# Altium PCB JSTtoMOLEX(1).PcbDoc
Units mm, origin at the board's own origin, x right, y up, seen from the top; angles counter-clockwise.
Board outline 109 x 67 mm, 2 copper layers (Top Layer, Bottom Layer); 3 components, 11 nets, 41 pads, 0 vias.
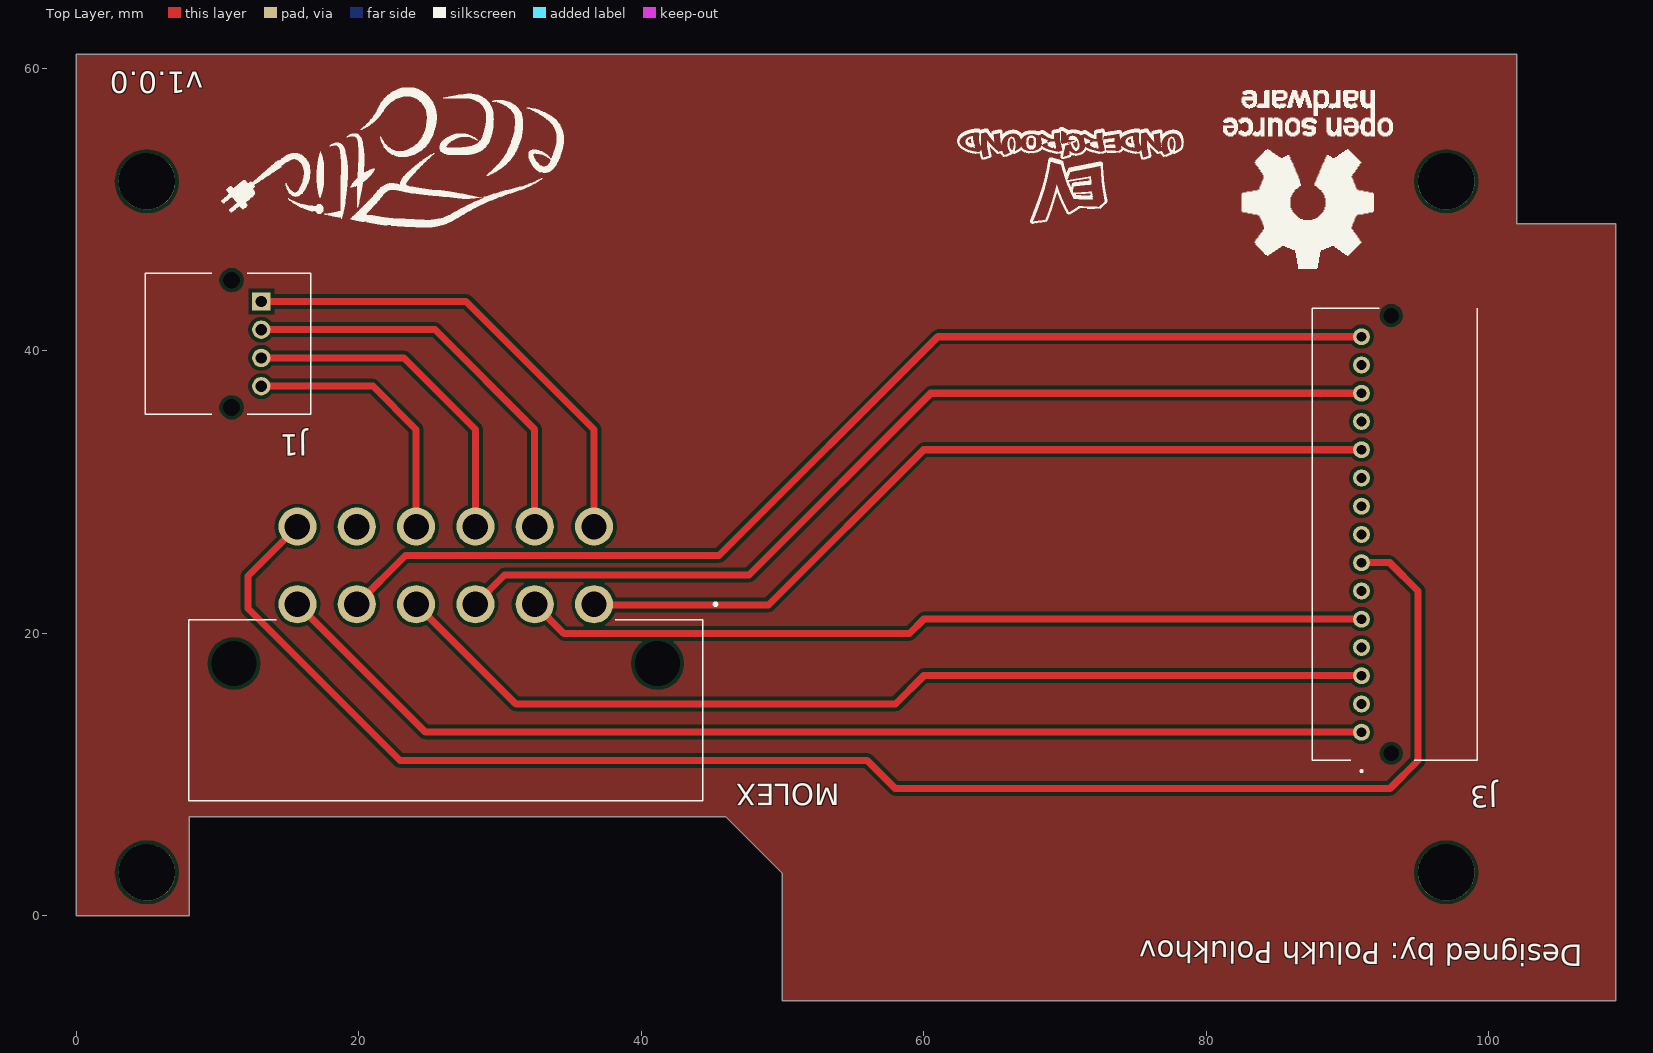
[diagram p0: Top Layer view]
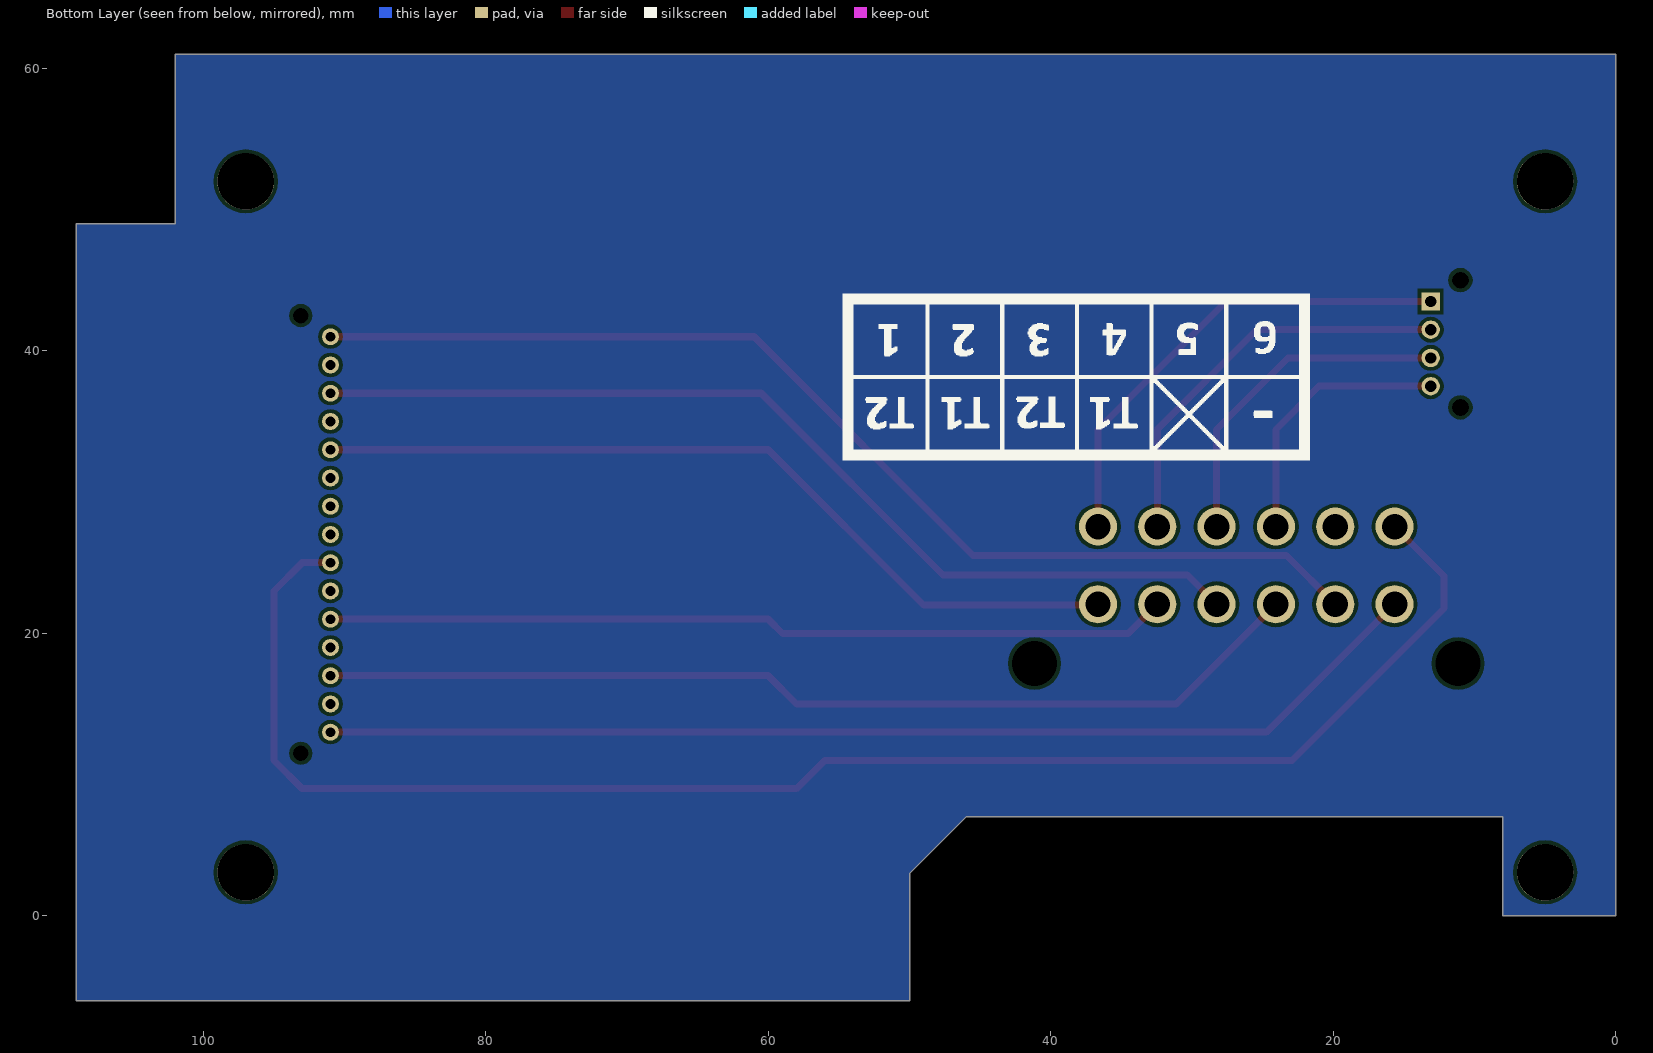
[diagram p1: Bottom Layer view, seen from below]
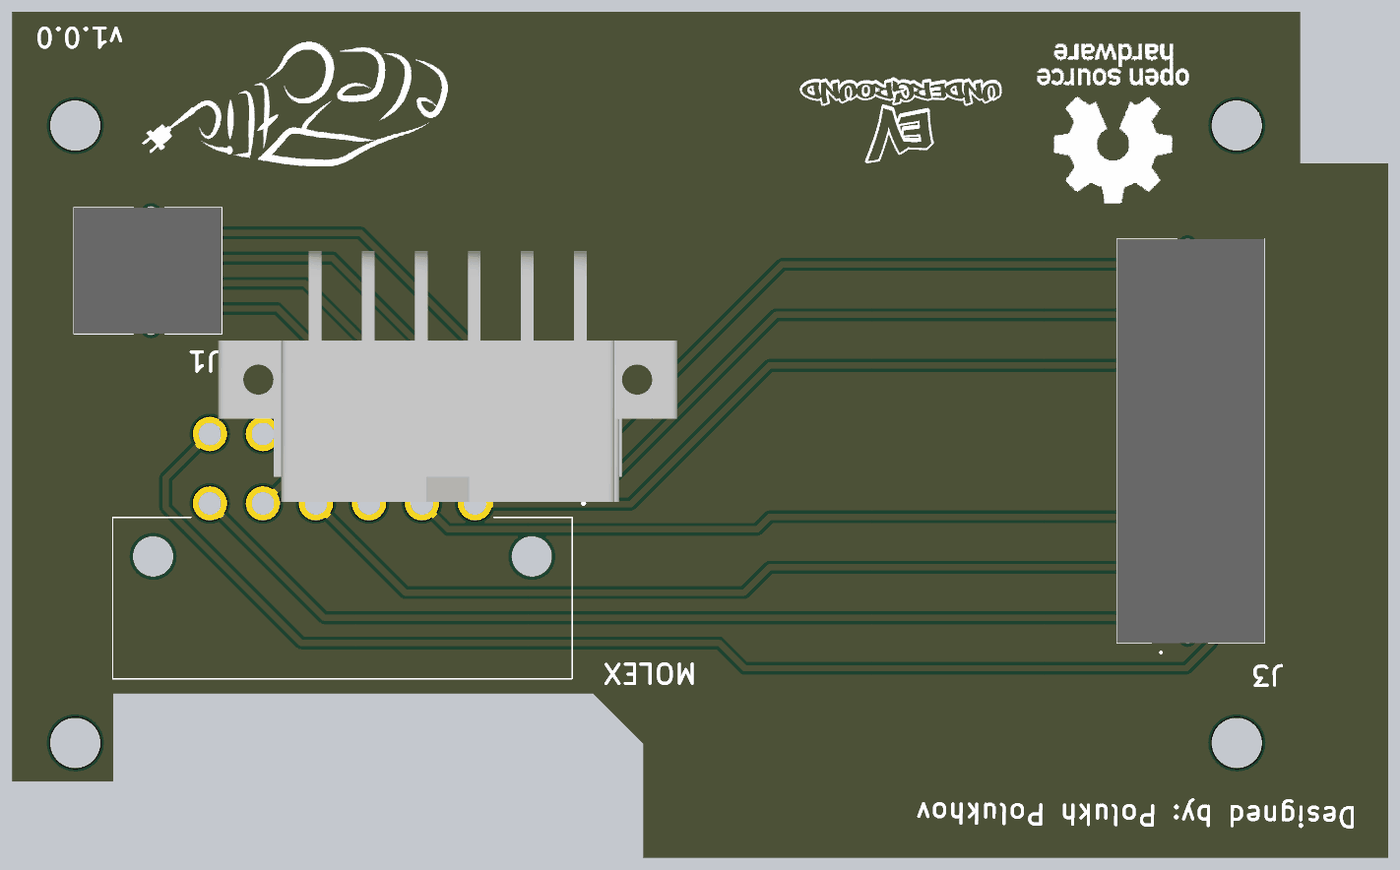
[diagram p2: 3D render of the assembled board from above, using the file's embedded part models]

## Layer stack, top to bottom
Top Solder: solder mask 0.0102, Solder Resist, Dk 3.5
Top Layer: signal copper 0.0356
Dielectric 1: dielectric 0.32, FR-4, Dk 4.8
Bottom Layer: signal copper 0.0356
Bottom Solder: solder mask 0.0102, Solder Resist, Dk 3.5

## Board outline
8,7 46,7 50,3 50,-6 109,-6 109,49 102,49 102,61 0,61 0,0 8,0

## Design rules (kind name [scope] priority, off if disabled: settings)
Clearance [All] p1: gap=0.254 ignorepadtopadclearanceinfootprint=FALSE except(0: Arc-Hole Track-Hole SMDPad-Hole THPad-Hole Via-Hole Fill-Hole Poly-Hole Region-Hole Text-Hole)
PolygonConnect [All] p1: connectstyle=Relief reliefconductorwidth=0.254 reliefentries=4 polygonreliefangle="90 Angle" airgapwidth=0.254
RoomDefinition JSTtoMOLEX [InComponentClass('JSTtoMOLEX')] p1: confinementstyle=ConfineIn formatcopy=TRUE lockcomponents=FALSE outline 0,-6 109.07,-6 109.07,61.03 0,61.03
RoutingVias [All] p1: holewidth=0.711 width=1.27 viastyle="Through Hole" minholewidth=0.711 minwidth=1.27 maxholewidth=0.711 maxwidth=1.27
SolderMaskExpansion [All] p1: expansion=0.102 istentingtop=FALSE
Width [All] p1: maxlimit=0.5 minlimit=0.254 preferedwidth=0.254
30 further rules are at their usual default settings.

## Components (designator, comment, footprint, x,y, rotation, side; value= is the part's Value field where it differs from the comment)
J1 "S04B-PASK-2" S04BPASK2 13.1,43.5 r90 top
J3 "S15B-PASK-2__LF__SN_" S15BPASK2LFSN 91,13 r270 top
MOLEX "39-29-1128" 39291128 36.66,22.06 r0 top (schematic designator J2)

## Footprints (in the part's own frame and the unit in brackets; to place one, negate y for a bottom-side part, rotate by r counter-clockwise, add the part's x,y. Pads: shape width x height; smd on the part's side, far side on the other; paste and mask are expansions set on the pad)
39291128 [mm]
  round 2.7 hole 1.8: 1(0,0) 2(-4.2,0) 3(-8.4,0) 4(-12.6,0) 5(-16.8,0) 6(-21,0) 7(0,5.5) 8(-4.2,5.5) 9(-8.4,5.5) 10(-12.6,5.5) 11(-16.8,5.5) 12(-21,5.5)
  round 1.6 hole 3.2 unplated: MH1(-25.5,-4.2) MH2(4.5,-4.2)
  silkscreen extent -28.7,-13.9 8.7,0.1, body extent -20.36,0.11 16.04,20.01, height 11.27
S04BPASK2 [mm]
  rect 1.3x1.3 hole 0.8: 1(0,0)
  round 1.3 hole 0.8: 2(-2,0) 3(-4,0) 4(-6,0)
  round 0.6 hole 1.2 unplated: MH1(1.5,2.1) MH2(-7.5,2.1)
  silkscreen extent -8,-3.5 2,8.2, body extent -8,-3.5 2,8.2, height 6.6
S15BPASK2LFSN [mm]
  round 1.2 hole 0.7: 1(0,0) 2(-2,0) 3(-4,0) 4(-6,0) 5(-8,0) 6(-10,0) 7(-12,0) 8(-14,0) 9(-16,0) 10(-18,0) 11(-20,0) 12(-22,0) 13(-24,0) 14(-26,0) 15(-28,0)
  round 0.55 hole 1.1 unplated: MH1(1.5,2.1) MH2(-29.5,2.1)
  silkscreen extent -30,-3.5 2.8,8.2, body extent -30,-3.5 2,8.2, height 7.8

## Part data
J1: "Connector", Manufacturer_Name="JST (JAPAN SOLDERLESS TERMINALS)", Datasheet Link=http://www.jst-mfg.com/product/pdf/eng/ePA-F.pdf?5d80b7662b42f, Height=6.5mm, Manufacturer_Part_Number=S04B-PASK-2
J3: "Connector", Manufacturer_Name="JST (JAPAN SOLDERLESS TERMINALS)", Manufacturer_Part_Number="S15B-PASK-2 (LF)(SN)", Datasheet Link=http://uk.rs-online.com/web/p/products/5469498, Height=7.7mm
MOLEX: "Connector", Manufacturer_Name=Molex, Mouser Part Number=538-39-29-1128, Datasheet Link=https://www.molex.com/pdm_docs/sd/039291128_sd.pdf, Height=11.7mm, Manufacturer_Part_Number=39-29-1128, Mouser Price/Stock=https://www.mouser.co.uk/ProductDetail/Molex/39-29-1128?qs=53in8j6h7oTziUEN8ceqiA%3D%3D

## Free pads (board coordinates)
  round 4 hole 4 unplated: 3(5,3.08) 3(5,52) 3(97,3.08) 3(97,52)

## Nets (pads, with @x,y where several pads share a name; then routed paths per layer and width w, separated by ;. In a path a pad name is that pad's centre, name@x,y a point inside that pad or via, vN(x,y) a via of type N, cw(c..) or ccw(c..) an arc to the next point about the centre after c; other vN are vias at no path point)
NetJ1_1: J1.1 MOLEX.7 | length 34.2
  Top Layer w0.5: J1.1 27.6,43.5 36.66,34.44 MOLEX.7
NetJ1_2: J1.2 MOLEX.8 | length 29.2
  Top Layer w0.5: J1.2 25.4,41.5 32.46,34.44 MOLEX.8
NetJ1_3: J1.3 MOLEX.9 | length 24.1
  Top Layer w0.5: J1.3 23.2,39.5 28.26,34.44 MOLEX.9
NetJ1_4: J1.4 MOLEX.10 | length 19.1
  Top Layer w0.5: J1.4 21,37.5 24.06,34.44 MOLEX.10
NetJ2_1: J3.11 MOLEX.1 | length 58.9
  Top Layer w0.5: MOLEX.1 36.72,22 49,22 60,33 J3.11
NetJ2_2: J3.5 MOLEX.2 | length 59.8
  Top Layer w0.5: MOLEX.2 34.52,20 59,20 60,21 J3.5
NetJ2_3: J3.13 MOLEX.3 | length 68.9
  Top Layer w0.5: MOLEX.3 30.33,24.13 47.63,24.13 60.5,37 J3.13
NetJ2_4: J3.3 MOLEX.4 | length 70.7
  Top Layer w0.5: MOLEX.4 31.12,15 58,15 60,17 J3.3
NetJ2_5: J3.15 MOLEX.5 | length 79
  Top Layer w0.5: MOLEX.5 23.3,25.5 45.5,25.5 61,41 J3.15
NetJ2_6: J3.1 MOLEX.6 | length 79.1
  Top Layer w0.5: MOLEX.6 24.72,13 J3.1
NetJ2_12: J3.7 MOLEX.12 | length 113
  Top Layer w0.5: MOLEX.12 12.15,24.05 12.15,21.76 22.91,11 56,11 58,9 93,9 95,11 95,23 93,25 J3.7
pads on no net: J1.MH1 J1.MH2 J3.2 J3.4 J3.6 J3.8 J3.9 J3.10 J3.12 J3.14 J3.MH1 J3.MH2 MOLEX.11 MOLEX.MH1 MOLEX.MH2

## Polygon pours and split planes (outlines as drawn)
no net on Top Layer "NONET_L01_P000" (solid, pour order 0): 8,7 46,7 50,3 50,-6 109,-6 109,49 102,49 102,61 0,61 0,0 8,0
no net on Bottom Layer "NONET_L02_P001" (solid, pour order 1): 8,7 46,7 50,3 50,-6 109,-6 109,49 102,49 102,61 0,61 0,0 8,0

## Silkscreen, mask and mechanical layers (free items; w line width, h text height)
Top Overlay:
  drawing of 41 lines, arcs and shapes, not listed
  text "v1.0.0" at 8.976,59.746 h1.52 r180
  text "Designed by: Polukh Polukhov" at 106.679,-2.039 h1.52 r179.46
Bottom Overlay:
  drawing of 16 lines, arcs and shapes, not listed